# Altium PCB Boost_Test.PcbDoc
Units mil, origin at the board's own origin, x right, y up, seen from the top; angles counter-clockwise.
Board outline 8570 x 4620 mil, 2 copper layers (Top Layer, Bottom Layer); 59 components, 0 nets, 174 pads, 34 vias.
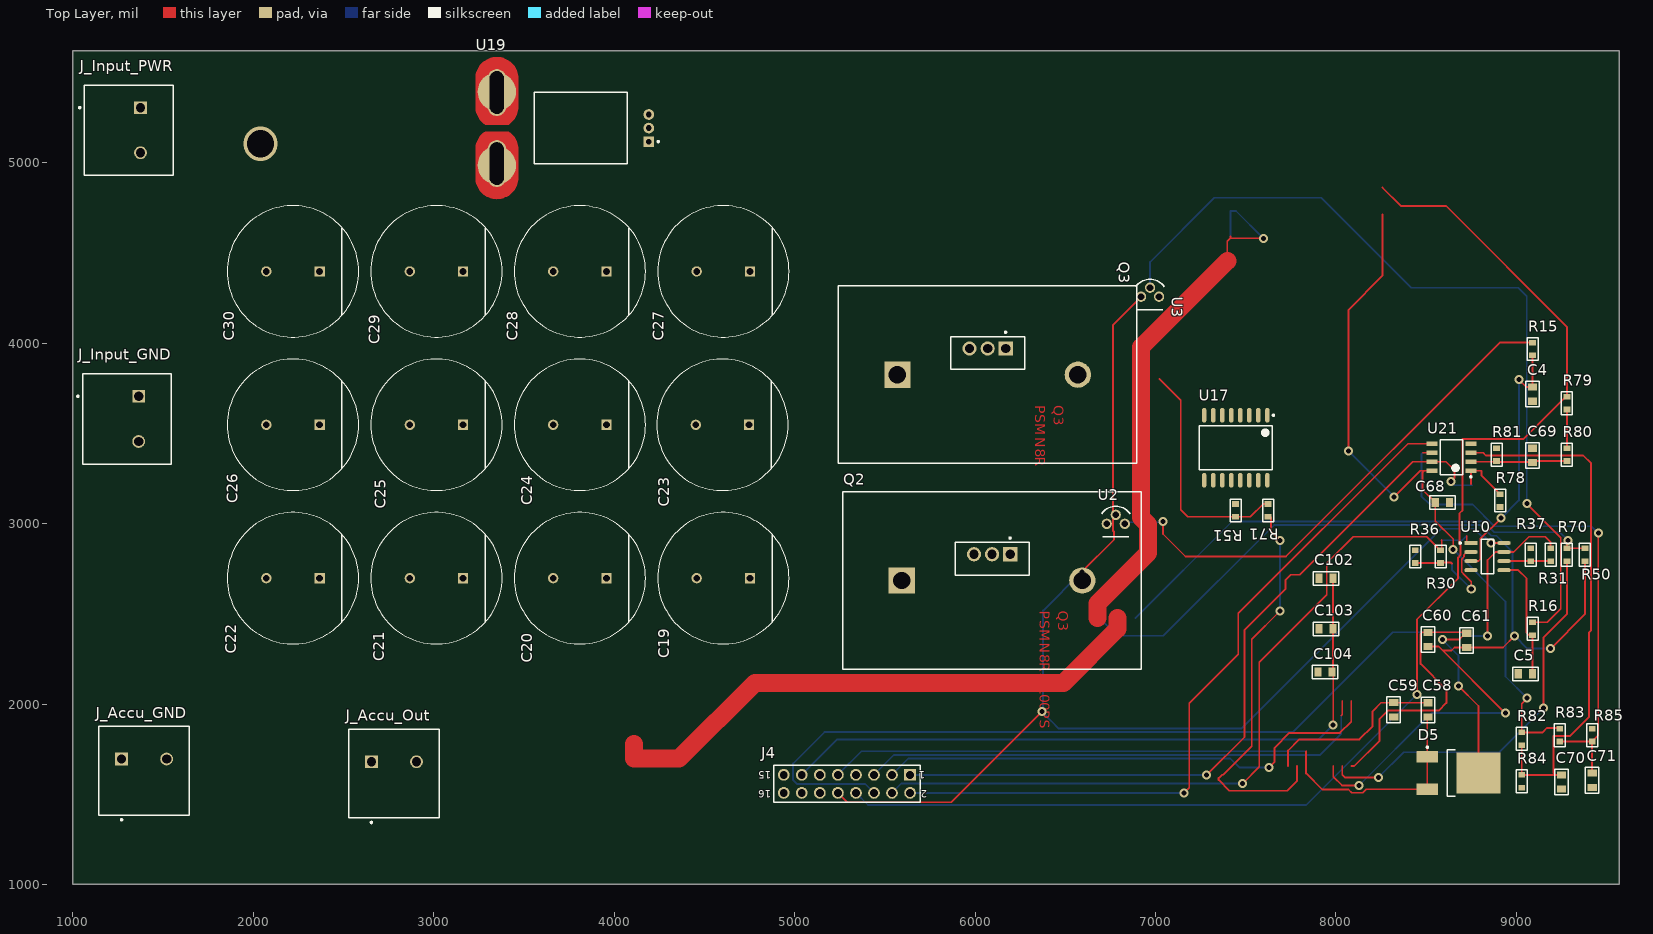
[diagram p0: Top Layer view]
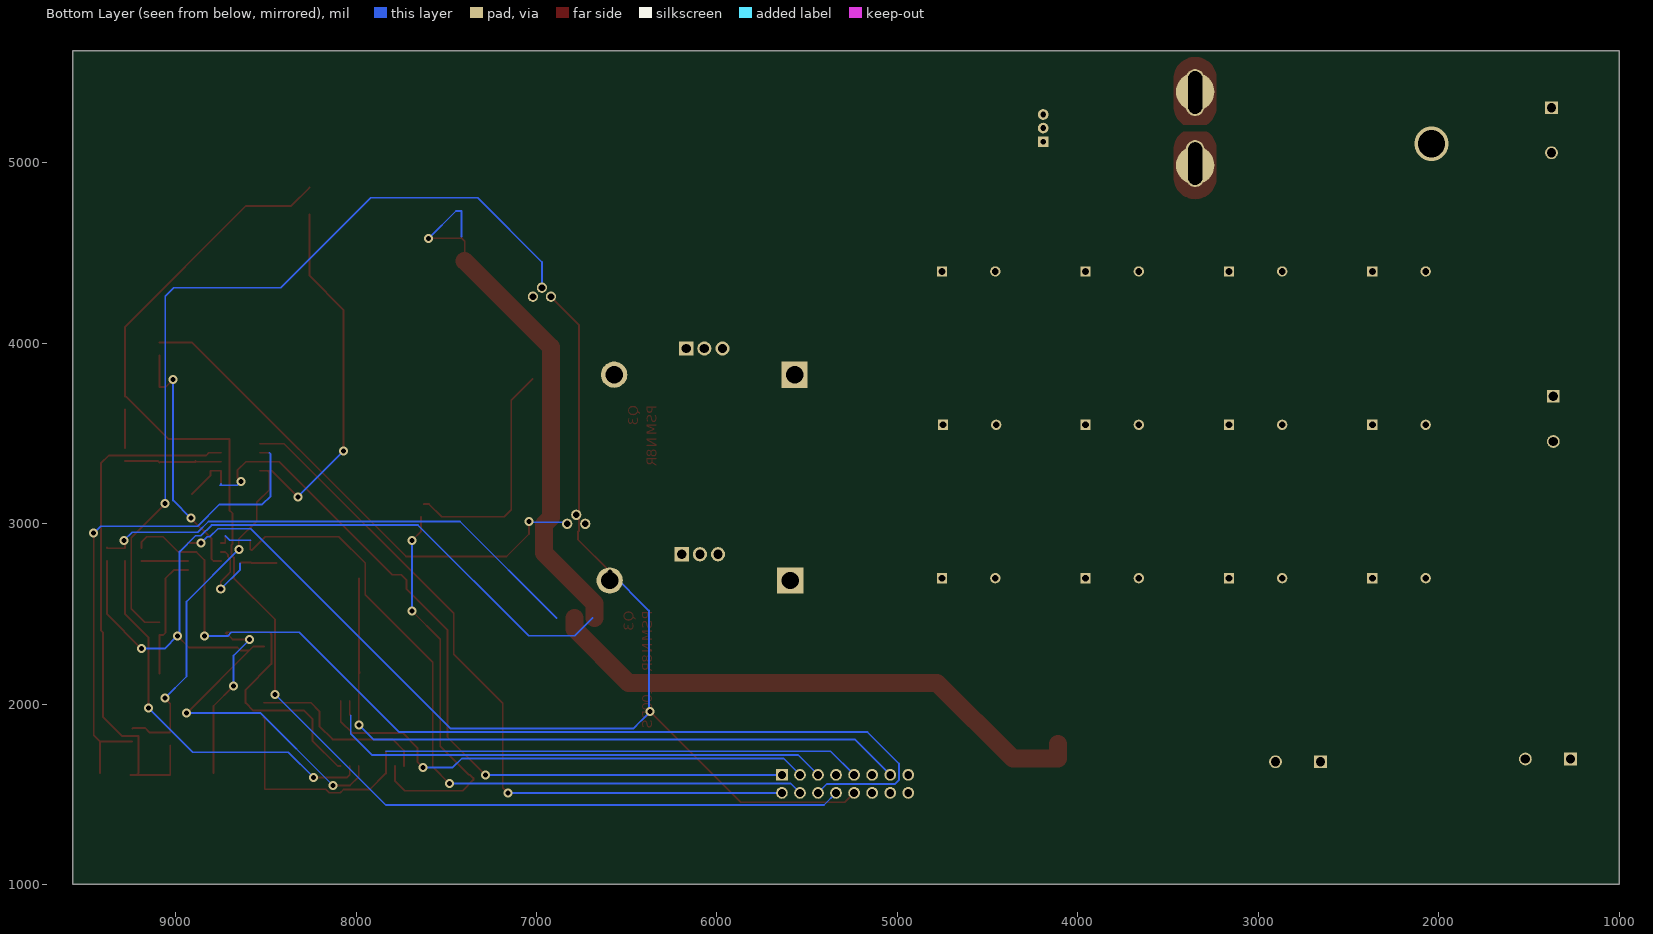
[diagram p1: Bottom Layer view, seen from below]

## Layer stack, top to bottom
Top Solder: solder mask 0.4, Solder Resist, Dk 3.5
Top Layer: signal copper 1.4
Dielectric 1: dielectric 12.6, FR-4, Dk 4.8
Bottom Layer: signal copper 1.4
Bottom Solder: solder mask 0.4, Solder Resist, Dk 3.5

## Board outline
1000,1000 9570,1000 9570,5620 1000,5620

## Design rules (kind name [scope] priority, off if disabled: settings)
Clearance [All] p1: gap=10 ignorepadtopadclearanceinfootprint=FALSE except(0: Arc-Hole Track-Hole SMDPad-Hole THPad-Hole Via-Hole Fill-Hole Poly-Hole Region-Hole Text-Hole)
PolygonConnect [All] p1: connectstyle=Relief reliefconductorwidth=10 reliefentries=4 polygonreliefangle="90 Angle" airgapwidth=10
RoutingVias [All] p1: holewidth=28 width=50 viastyle="Through Hole" minholewidth=28 minwidth=50 maxholewidth=28 maxwidth=50
SolderMaskExpansion [All] p1: expansion=4 istentingtop=FALSE
Width [All] p1: maxlimit=10 minlimit=10 preferedwidth=10
30 further rules are at their usual default settings.

## Components (designator, comment, footprint, x,y, rotation, side; value= is the part's Value field where it differs from the comment)
C4 "22uF" FP_0805_CAP_085 9090.1,3717.35 r90 top
C5 "22uF" FP_0805_CAP_085 9050.1,2167.35 r0 top
C19 "330 uF" FP-LXW18X25-MFG 4605.1,2697.35 r180 top
C20 "330 uF" FP-LXW18X25-MFG 3810.1,2697.35 r180 top
C21 "330 uF" FP-LXW18X25-MFG 3015.1,2697.35 r180 top
C22 "330 uF" FP-LXW18X25-MFG 2220.1,2697.35 r180 top
C23 "330 uF" FP-LXW18X25-MFG 4600.1,3547.35 r180 top
C24 "330 uF" FP-LXW18X25-MFG 3810.1,3547.35 r180 top
C25 "330 uF" FP-LXW18X25-MFG 3015.1,3547.35 r180 top
C26 "330 uF" FP-LXW18X25-MFG 2220.1,3547.35 r180 top
C27 "330 uF" FP-LXW18X25-MFG 4605.1,4397.35 r180 top
C28 "330 uF" FP-LXW18X25-MFG 3810.1,4397.35 r180 top
C29 "330 uF" FP-LXW18X25-MFG 3015.1,4397.35 r180 top
C30 "330 uF" FP-LXW18X25-MFG 2220.1,4397.35 r180 top
C44 "CAP_AC_68uF" Capacitor_AC_68_uF -100028.9,100356.35 r90 top
C58 "100nF" FP_0805_CAP_085 8510.1,1967.35 r270 top
C59 "1uF" FP_0805_CAP_085 8320.1,1967.98 r270 top
C60 "100nF" FP_0805_CAP_085 8510.1,2357.98 r90 top
C61 "1uF" FP_0805_CAP_085 8725.1,2352.54 r90 top
C68 "100nF" FP_0805_CAP_085 8590.1,3117.35 r0 top
C69 "68nF" FP_0805_CAP_085 9090.1,3377.98 r90 top
C70 "100nF" FP_0805_CAP_085 9250.1,1567.35 r270 top
C71 "100nF" FP_0805_CAP_085 9420.1,1577.35 r270 top
C102 "100nF" FP_0805_CAP_085 7945.1,2696.91 r0 top
C103 "100nF" FP_0805_CAP_085 7945.1,2416.91 r0 top
C104 "100nF" FP_0805_CAP_085 7940.1,2177.35 r0 top
D5 "MBRD360T4G" ONSC-DPAK-3-369C-01_V 8679.87,1617.35 r0 top
J4 "61301621121" 61301621121 5290.1,1557.35 r180 top
J_Accu_GND "1714955" Terminal-PHOE-1714955_V 1395,1695 r0 top
J_Accu_Out "1714955" Terminal-PHOE-1714955_V 2780,1680 r0 top
J_Input_GND "1714955" Terminal-PHOE-1714955_V 1365,3580 r270 top
J_Input_PWR "1714955" Terminal-PHOE-1714955_V 1375,5180 r270 top
L2 "Coil" Tekercs_E65_FERRITE 11725,4470 r0 top value="50 uH"
Q2 "PSMN8R5-100PS" FP-TO-220AB-MFG 6094.61,2804.51 r270 top
Q3 "" FP-TO-220AB-MFG 6070,3945 r270 top
R15 "10K" FP_0603_RES 9090.1,3967.35 r270 top
R16 "10K" FP_0603_RES 9090.1,2417.35 r270 top
R30 "10K" FP_0603_RES 8580.1,2817.35 r270 top
R31 "10K" FP_0603_RES 9190.1,2827.35 r270 top
R36 "10K" FP_0603_RES 8440.1,2817.35 r270 top
R37 "10K" FP_0603_RES 9080.1,2827.35 r270 top
R50 "3.3K" FP_0603_RES 9380.1,2827.35 r90 top
R51 "3.3K" FP_0603_RES 7443.98,3072.66 r90 top
R70 "1.8" FP_0603_RES 9280.1,2827.35 r90 top
R71 "1.8" FP_0603_RES 7623.98,3072.66 r90 top
R78 "3K" FP_0603_RES 8910.1,3127.35 r270 top
R79 "220" FP_0603_RES 9280.1,3667.35 r90 top
R80 "10K" FP_0603_RES 9280.1,3381.91 r270 top
R81 "20K" FP_0603_RES 8890.11,3381.91 r90 top
R82 "10K" FP_0603_RES 9030.1,1807.35 r270 top
R83 "22K" FP_0603_RES 9240.1,1827.35 r270 top
R84 "20K" FP_0603_RES 9030.1,1571.91 r270 top
R85 "10K" FP_0603_RES 9420.1,1827.35 r90 top
U2 "MCP9700-E/TO" FP-C04-101-MFG 6780,3010 r270 top
U3 "MCP9700-E/TO" FP-C04-101-MFG 6970.1,4268.6 r270 top
U10 "LM358DR2G" FP-751-07-IPC_C 8840.1,2817.35 r0 top
U17 "2EDS8265HXUMA2" EXAR-WSOIC-16_N 7445,3420 r270 top
U19 "ACS758LCB-050B-PFF-T" FP-CB-5-PFF-MFG 3814.94,5191.85 r90 top
U21 "LM393DR2G" ONSC-SOIC-8-751-07_V 8640.1,3367.35 r180 top

## Footprints (in the part's own frame and the unit in brackets; to place one, negate y for a bottom-side part, rotate by r counter-clockwise, add the part's x,y. Pads: shape width x height; smd on the part's side, far side on the other; paste and mask are expansions set on the pad)
61301621121 [mm] "Pin Header, pitch 2.54 mm, THT, Vertical, dual row, 16p"
  rect 1.65x1.65 hole 1.1: 1(-8.89,-1.27)
  round 1.65 hole 1.1: 2(-8.89,1.27) 3(-6.35,-1.27) 4(-6.35,1.27) 5(-3.81,-1.27) 6(-3.81,1.27) 7(-1.27,-1.27) 8(-1.27,1.27) 9(1.27,-1.27) 10(1.27,1.27) 11(3.81,-1.27) 12(3.81,1.27) 13(6.35,-1.27) 14(6.35,1.27) 15(8.89,-1.27) 16(8.89,1.27)
  silkscreen extent -10.31,-2.61 10.31,2.61, body extent -10.16,-2.54 10.16,2.54, height 8.59
Capacitor_AC_68_uF [mil]
  round 55 hole 35: 1(-120503.27,-120503.27) 2(-119418.27,-120503.27)
  silkscreen extent -120581,-120933 -119341,-120073
EXAR-WSOIC-16_N [mm] "SOIC, 16-Leads, Body 10.30x7.50mm, Pitch 1.27mm, IPC Medium Density"
  oval 2.1x0.6 smd: 1(-4.575,4.445) 2(-4.575,3.175) 3(-4.575,1.905) 4(-4.575,0.635) 5(-4.575,-0.635) 6(-4.575,-1.905) 7(-4.575,-3.175) 8(-4.575,-4.445) 9(4.575,-4.445) 10(4.575,-3.175) 11(4.575,-1.905) 12(4.575,-0.635) 13(4.575,0.635) 14(4.575,1.905) 15(4.575,3.175) 16(4.575,4.445)
  silkscreen extent -4.7,-5.15 3.13,5.42, body extent -3.75,-5.15 3.75,5.15, height 2.65
FP-751-07-IPC_C [mil]
  rect 73.78x21.39 smd paste+0 mask+0: 1(-91.18,75)
  rrect100% 73.78x21.39 smd paste+0 mask+0: 2(-91.18,25) 3(-91.18,-25) 4(-91.18,-75) 5(91.18,-75) 6(91.18,-25) 7(91.18,25) 8(91.18,75)
  silkscreen extent -157,-96 35,96, body extent -132,-100 132,100, height 10
FP-C04-101-MFG [mm]
  round 1.45 hole 0.95 paste-1000 mask+0: 1(0.286,-1.27) 2(-0.984,0) 3(0.286,1.27)
  silkscreen extent -2.17,-2.01 2.13,2.01
FP-CB-5-PFF-MFG [mm]
  rect 1.5x1.5 hole 0.8 paste-1000 mask+0: 1(-1.91,-9.59)
  round 1.5 hole 0.8 paste-1000 mask+0: 2(0,-9.59) 3(1.91,-9.59)
  rrect100% 6.6x2.6 hole 2 slot 6 at 0 deg paste-1000 mask+0: 4(5,11.809) 5(-5,11.809)
  round 5.4 smd paste-1000 mask+0: 4(5.099,11.809) 5(-5.25,11.809)
  round 5.4 smd far side paste-1000 mask+0: 4(5.099,11.809) 5(-5.25,11.809)
  Top Layer region: -0.5,10.151 -1.581,9.166 -3,8.81 -3,8.81 -7,8.809 -8.302,9.107 -9.345,9.939 -9.925,11.142 -9.925,12.477 -9.345,13.68 -8.302,14.512 -7,14.809 -7,14.81 -3,14.81 -1.581,14.453 -0.5,13.468 -0.5,13.468
  Top Layer region: 0.5,13.468 1.581,14.453 3,14.809 3,14.809 7,14.81 8.302,14.512 9.345,13.68 9.925,12.477 9.925,11.142 9.345,9.939 8.302,9.107 7,8.809 7,8.809 3,8.809 1.581,9.166 0.5,10.151 0.5,10.151
  silkscreen extent -5.05,-11.04 5.05,6.55, body extent -10.1,-10.44 10.1,14.91, height 0.25
FP-LXW18X25-MFG [mm]
  rect 1.45x1.45 hole 0.95 paste-1000 mask+0: 1(-3.75,0)
  round 1.45 hole 0.95 paste-1000 mask+0: 2(3.75,0)
  silkscreen extent -9.25,-9.25 9.25,9.25, body extent -9.35,-9.35 9.35,9.35, height 0.25
FP-TO-220AB-MFG [mm]
  rect 2x2 hole 1.3 paste-1000 mask+0: 1(-0.647,2.55)
  rect 3.7x3.7 hole 2.45 paste-1000 mask+0: 1(3.048,-12.7)
  round 2 hole 1.3 paste-1000 mask+0: 2(-0.647,0) 3(-0.647,-2.55)
  round 3.7 hole 2.45 paste-1000 mask+0: 2(3.048,12.7)
  Top Layer region: 12.816,-13.418 12.816,-13.418 12.816,-13.418 12.816,-13.418
  Top Layer region: 12.816,-13.418 12.816,-13.418 12.816,-13.418 12.816,-13.418
  Top Layer region: 12.816,-13.418 12.816,-13.418 12.816,-13.418 12.816,-13.418
  silkscreen extent -9.45,-21 15.55,21, body extent -9.55,-21.1 15.65,21.1, height 0.25
FP_0603_RES [mm] "0603 ellenállás"
  rect 0.8x0.95 smd: 1(-0.9,0) 2(0.9,0)
  silkscreen extent -1.6,-0.78 1.6,0.78, body extent -0.8,-0.4 0.8,0.4, height 0.44
FP_0805_CAP_085 [mm] "0805 kapacitás YAGEO 0.85mm magas"
  rect 1x1.3 smd: 1(-1,0) 2(1,0)
  silkscreen extent -1.8,-0.95 1.8,0.95, body extent -1,-0.64 1.03,0.64, height 0.85
ONSC-DPAK-3-369C-01_V [mm] "DPAK, 3-Leads, Body 6.54x6.095mm, Pitch 2.29mm"
  rect 3x1.6 smd: 1(-4.4,2.29) 3(-4.4,-2.29)
  rect 6.2x5.8 smd: 4(2.8,0)
  silkscreen extent -4.52,-3.27 -0.45,3.76, body extent -1.6,-3.27 4.49,3.27, height 2.38
ONSC-SOIC-8-751-07_V [mm] "SOIC, 8-Leads, Body 4.9x3.9mm, Pitch 1.27mm"
  rect 1.52x0.6 smd: 1(-2.74,1.905) 2(-2.74,0.635) 3(-2.74,-0.635) 4(-2.74,-1.905) 5(2.74,-1.905) 6(2.74,-0.635) 7(2.74,0.635) 8(2.74,1.905)
  silkscreen extent -2.87,-2.45 1.58,2.88, body extent -1.95,-2.45 1.95,2.45, height 1.75
Tekercs_E65_FERRITE [mil]
  round 190 hole 150: 1(-700,0) 2(700,0)
  silkscreen extent -550,-1300 550,1300
Terminal-PHOE-1714955_V [mm] "Terminal Block, 2-Leads, Body 12.7x12.5mm, Pitch 6.35mm"
  rect 1.8x1.8 hole 1.3: 1(-3.175,0)
  round 1.8 hole 1.3: 2(3.175,0)
  silkscreen extent -6.35,-8.67 6.35,4.6, body extent -6.92,-7.9 6.35,4.6, height 21.51

## Part data
C4 C5 C58 C59 C60 C61 C68 C69 C70 C71 C102 C103 C104: library part CAP, "Capacitor"
C19 C20 C21 C22 C23 C24 C25 C26 C27 C28 C29 C30: library part CMP-35376-000008-1, "CAP ALUM 47UF 20% 500V THRUHOLE / 500LXW47MEFR18X25"
C44: "Cap Film 68uF 100V PET 10% (31.5 X 22 X 36.5mm) Radial 27.5mm 125C Bulk", Capacitance=68uF, Case/Package=Radial, Dielectric=PET, Dielectric Material=Polyester, Manufacturer="TDK EPCOS", Manufacturer Part Number=B32524Q1686K000, Max Operating Temperature=125°C, Min Operating Temperature=-55°C, Tolerance=10%, Voltage Rating=100V, Category="Film Capacitors", ComponentLink1Description=http://www.farnell.com/datasheets/1955213.pdf?src-supplier=Farnell, ComponentLink1URL=http://www.farnell.com/datasheets/1955213.pdf?src-supplier=Farnell, ComponentLink2Description=http://components.arrow.com/part/dataview/0323_01924821?src-supplier=Arrow+Europe, ComponentLink2URL=http://components.arrow.com/part/dataview/0323_01924821?src-supplier=Arrow+Europe, ComponentLink3Description=https://www.tdk-electronics.tdk.com/inf/20/20/db/fc_2009/B32520_529.pdf?src-supplier=Digi-Key, ComponentLink3URL=https://www.tdk-electronics.tdk.com/inf/20/20/db/fc_2009/B32520_529.pdf?src-supplier=Digi-Key, ComponentLink4Description=http://www.farnell.com/datasheets/1955213.pdf?src-supplier=Element14, ComponentLink4URL=http://www.farnell.com/datasheets/1955213.pdf?src-supplier=Element14, Depth=22mm, Lead Diameter=0.8mm, Lead Pitch=27.5mm, Length=31.5mm, Packaging=Bulk, Pricing 1="1=16,57000, 10=15,74200, 50=13,25680, 100=12,42830, 500=11,01972, 1000=10,35688 (USD)", REACH SVHC="No SVHC", RoHS=Yes, RoHS Compliant=Yes, Stock 1=15, Supplier 1=Digi-Key, Voltage Rating (DC)=100V
D5: library part CMP-1055-00192-1, "SWITCHMODE(TM) Power Rectifier, 3-Pin DPAK, Pb-Free, Tape and Reel", Manufacturer="On Semiconductor", ComponentLink1Description="Manufacturer URL", ComponentLink1URL=http://www.onsemi.com/, ComponentLink2Description=Datasheet, ComponentLink2URL=http://www.onsemi.com/pub_link/Collateral/MBRD320-D.PDF, ComponentLink3Description="Package Specification", ComponentLink3URL=http://www.onsemi.cn/pub_link/Collateral/369C.PDF, Configuration=Single, DatasheetVersion="Rev. 8", IFSM Max (A)=75, Mounting Technology="Surface Mount", PackageDescription="3-Pin Flange Mount, Body 6.54 x 6.095 mm, Pitch 2.29 mm", PackageReference=DPAK-3-369C-01, PackageVersion="Rev. E, 02/2014", Packing="Tape and Reel", PartNumber=MBRD360T4G, RoHS=TRUE
J4: library part CMP-1502-01097-1, "THT Vertical Pin Header WR-PHD, Pitch 2.54 mm, Dual Row, 16 pins", Contact Resistance=20mOhm, Manufacturer="Wurth Elektronik", Operating Temperature=-40to105degC, Rated Current=3A, Withstanding Voltage=500VAC, Working Voltage=250VAC, Datasheet URL=https://katalog.we-online.de/em/datasheet/6130xx21121.pdf, Gender=Male, Manufacturer URL=http://www.we-online.de, Mounting Technology=THT, Orientation=Vertical, Package Reference=61301621121, Packaging=Bag, Part Number=61301621121, Pin Number=16, Pitch=2.54mm, Publisher=WurthElektronik, Row Number=Dual
J_Accu_GND J_Accu_Out J_Input_GND J_Input_PWR: library part Terminal-CMP-2000-05797-1, "PC Terminal Block, Pitch 6.35 mm, 1 x 2 Position, Height 21.5 mm, Tail Lenght 5.1 mm, RoHS, Bulk", Manufacturer="Phoenix Contact", Package Description="PC Terminal Block, Pitch 6.35 mm, 1 x 2 Position, Height 21.5 mm, Tail Lenght 5.1 mm", Datasheet URL=http://media.digikey.com/pdf/Data%20Sheets/Phoenix%20Contact%20PDFs/1714955.pdf, Datasheet Version=02/2010, Manufacturer URL=http://www.phoenixcontact.com/, Mounting Technology=ThroughHole, Package Reference=1714955
L2: "50 uH", Category=Inductor
Q2 Q3: library part NMOS-2, "N-channel 100 V 8.5 mΩ standard level MOSFET in TO220", ComponentLink1Description="Manufacturer Link", ComponentLink1URL=http://www.irf.com/, DatasheetVersion=PD-9.814, LatestRevisionDate=17-Jul-2002, LatestRevisionNote="Re-released for DXP Platform.", Note="Pin 2 is electrically connected to pin 4.", PackageDescription="TO, Thru-Hole, Vertical, Heatsink Mounted; 3 In-Line Leads; Pitch 2.54 mm", PackageReference=TO-220AB, PackageVersion=Feb-1997, Published=8-Jun-2000, Publisher="Altium Limited"
R15 R16 R30 R31 R36 R37 R50 R51 R70 R71 R78 R79 R80 R81 R82 R83 R84 R85: library part RES, "Resistor"
U2 U3: library part CMP-0192-00001-2, "SENSOR ANALOG -40C-125C TO92-3", Ambient Temperature Range High=+125°C, Ambient Temperature Range Low=-40°C, Manufacturer=Microchip, Max Junction Temp=+150°C, Max Supply Voltage=5.5V, Min Supply Voltage=2.3V, Operating Supply Current=6uA, Output Current=100uA, Output Voltage=500mV, Package=C04-101, Temperature="-40°C to +125°C", Automotive=No, Category=IC, ComponentLink2Description=Datasheet, ComponentLink2URL=http://ww1.microchip.com/downloads/en/DeviceDoc/20001942G.pdf, Device Class L1=Sensors, Device Class L2="Temperature and Humidity Sensors", Device Class L3=unset, Digikey Description="SENSOR ANALOG -40C-125C TO92-3", Footprint Url=http://ww1.microchip.com/downloads/en/DeviceDoc/3L_TO-92%20Plastic%20Transistor%20Outline_TO_C04-00101c.pdf, Height=5.334mm, Import Ts=1521170835, Ipc Land Pattern Name=TO-92, Lead Free=Yes, Manufacturer Part Number=MCP9700-E/TO, Mouser Description="Board Mount Temperature Sensors Lin Active Therm", Octopart=https://octopart.com/mcp9700-e%2Fto-microchip-668812, RoHS=TRUE, Sensor Output="Analog Voltage", Temperature Range High=+125°C, Temperature Range Low=-40°C
U10: library part CMP-1310-00291-2, "IC OPAMP GP 2 CIRCUIT 8SOIC", Case/Package=SOIC, Dual Supply Voltage=9V, Input Bias Current=250nA, Input Offset Voltage (Vos)=7mV, Max Dual Supply Voltage=16V, Max Operating Temperature=70°C, Max Supply Voltage=32V, Min Dual Supply Voltage=1.5V, Min Operating Temperature=0°C, Min Supply Voltage=3V, Nominal Supply Current=1.2mA, Operating Supply Current=1.5mA, Output Current=40mA, Package Quantity=2500, Power Supply Rejection Ratio (PSRR)=65dB, Voltage Gain=100dB, Bandwidth=1MHz, Common Mode Rejection Ratio=65dB, Contact Plating=Tin, Gain Bandwidth Product=1MHz, Halogen Free="Halogen Free", Height=1.5mm, Lead Free="Lead Free", Length=5mm, Number of Amplifiers=2, Number of Channels=2, Number of Circuits=2, Number of Elements=2, Number of Pins=8, Operating Supply Voltage=16V, Output Current per Channel=40mA, Packaging="Tape and Reel", Radiation Hardening=No, REACH SVHC="No SVHC", Slew Rate=0.6V/µs, Width=4mm
U17: library part GATE_DRIVER_2EDS8265HXUMA2, "2EDS8265HXUMA2 / Gate-Driver 8A", Case/Package="SOIC W", Manufacturer=Exar, Max Operating Temperature=70°C, Max Power Dissipation=1.26W, Max Supply Voltage=5.5V, Min Operating Temperature=0°C, Min Supply Voltage=3V, Nominal Supply Current=1mA, Package Quantity=41, Category="RS-232 / RS-422 / RS-485 Interface ICs", ComponentLink1Description=https://datasheet.ciiva.com/22828/0900766b81141d49-22828237.pdf?src-supplier=RSComponents, ComponentLink1URL=https://datasheet.ciiva.com/22828/0900766b81141d49-22828237.pdf?src-supplier=RSComponents, ComponentLink2Description=https://datasheet.ciiva.com/1715/sp3222eb-sp3232eb-103-081414-1715199.pdf?src-supplier=Digi-Key, ComponentLink2URL=https://datasheet.ciiva.com/1715/sp3222eb-sp3232eb-103-081414-1715199.pdf?src-supplier=Digi-Key, ComponentLink3Description=https://datasheet.ciiva.com/16380/sp3232ebca-l-16380121.pdf?src-supplier=Future+Electronics, ComponentLink3URL=https://datasheet.ciiva.com/16380/sp3232ebca-l-16380121.pdf?src-supplier=Future+Electronics, ComponentLink4Description=https://datasheet.ciiva.com/15208/getdatasheetpartid-558353-15208838.pdf?src-supplier=Verical, ComponentLink4URL=https://datasheet.ciiva.com/15208/getdatasheetpartid-558353-15208838.pdf?src-supplier=Verical, Height=2.55mm, Lead Free="Lead Free", Length=10.3mm, Logic Function=Transceiver, Manufacturer Part Number=2EDS8265HXUMA2, Number of Drivers=2, Number of I/Os=4, Number of Pins=16, Number of Receivers=2, Number of Transceivers=1, Number of Transmitters=2, Packaging=Rail/Tube, Propagation Delay=0.15us, Radiation Hardening=No, RoHS=Yes, Series=-, Supplier 1="Allied Electronics", Supply Current=1mA, Width=7.5mm
U19: library part ACS758LCB-CMP-82923-000254-1, "SENSOR CURRENT HALL 50A AC/DC", Current Sensing=50A, Frequency=120kHz, Max Operating Temperature=150°C, Max Supply Current=13.5mA, Max Supply Voltage=5.5V, Min Operating Temperature=-40°C, Min Supply Voltage=3V, Operating Supply Voltage=5V, Output Current=1mA, Package Quantity=34, Quiescent Current=10mA, Accuracy=2%, Bandwidth=120kHz, Height=7mm, Lead Free="Lead Free", Length=10mm, Linearity=1%, Mount="Through Hole", Number of Channels=1, Number of Pins=5, Packaging=Rail/Tube, Polarity=Bidirectional, Radiation Hardening=No, REACH SVHC="No SVHC", Response Time=4us, RoHS Compliant=Yes, Sensitivity=40mV/A, Series=-, Width=13mm
U21: library part CMP-1305-00048-1, "Low Offset Voltage Dual Comparators, 2 to 36 V, 0 to 70 degC, 8-Pin SOIC, Pb-Free, Tape and Reel", Manufacturer="On Semiconductor", ComponentLink1Description="Manufacturer URL", ComponentLink1URL=http://www.onsemi.com/, ComponentLink2Description=Datasheet, ComponentLink2URL=http://www.onsemi.com/pub_link/Collateral/LM393-D.PDF, ComponentLink3Description="Package Specification", ComponentLink3URL=http://www.onsemi.com/pub_link/Collateral/751-07.PDF, DatasheetVersion="Rev. 25", ICC Typ (mA)=0.4, IO Typ (mA)=16, Mounting Technology="Surface Mount", PackageDescription="8-Pin Small Outline Integrated Circuit, Body 4.9 x 3.9 mm, Pitch 1.27 mm", PackageReference=SOIC-8-751-07, PackageVersion="Rev. AK, 02/2011", Packing="Tape and Reel", PartNumber=LM393DR2G, RoHS=TRUE, VCC Max (V)=36, VCC Min (V)=2

## Via types
v1: diameter 50, hole 28, Top Layer to Bottom Layer, 33 vias
v2: diameter 190, hole 150, Top Layer to Bottom Layer, 1 vias

## Nets (pads, with @x,y where several pads share a name; then routed paths per layer and width w, separated by ;. In a path a pad name is that pad's centre, name@x,y a point inside that pad or via, vN(x,y) a via of type N, cw(c..) or ccw(c..) an arc to the next point about the centre after c; other vN are vias at no path point)
pads on no net: C4.1 C4.2 C5.1 C5.2 C19.1 C19.2 C20.1 C20.2 C21.1 C21.2 C22.1 C22.2 C23.1 C23.2 C24.1 C24.2 C25.1 C25.2 C26.1 C26.2 C27.1 C27.2 C28.1 C28.2 C29.1 C29.2 C30.1 C30.2 C44.1 C44.2 C58.1 C58.2 C59.1 C59.2 C60.1 C60.2 C61.1 C61.2 C68.1 C68.2 C69.1 C69.2 C70.1 C70.2 C71.1 C71.2 C102.1 C102.2 C103.1 C103.2 C104.1 C104.2 D5.1 D5.3 D5.4 J4.1 J4.2 J4.3 J4.4 J4.5 J4.6 J4.7 J4.8 J4.9 J4.10 J4.11 J4.12 J4.13 J4.14 J4.15 J4.16 J_Accu_GND.1 J_Accu_GND.2 J_Accu_Out.1 J_Accu_Out.2 J_Input_GND.1 J_Input_GND.2 J_Input_PWR.1 J_Input_PWR.2 L2.1 L2.2 Q2.1 Q2.2 Q2.3 Q3.1 Q3.2 Q3.3 R15.1 R15.2 R16.1 R16.2 R30.1 R30.2 R31.1 R31.2 R36.1 R36.2 R37.1 R37.2 R50.1 R50.2 R51.1 R51.2 R70.1 R70.2 R71.1 R71.2 R78.1 R78.2 R79.1 R79.2 R80.1 R80.2 R81.1 R81.2 R82.1 R82.2 R83.1 R83.2 R84.1 R84.2 R85.1 R85.2 U2.1 U2.2 U2.3 U3.1 U3.2 U3.3 U10.1 U10.2 U10.3 U10.4 U10.5 U10.6 U10.7 U10.8 U17.1 U17.2 U17.3 U17.4 U17.5 U17.6 U17.7 U17.8 U17.9 U17.10 U17.11 U17.12 U17.13 U17.14 U17.15 U17.16 U19.1 U19.2 U19.3 U19.4 U19.5 U21.1 U21.2 U21.3 U21.4 U21.5 U21.6 U21.7 U21.8
copper on no net: | length 91773.9
  Top Layer w10: 5240.1,1507.35 5292.1,1455.35 5868.1,1455.35 v1(6370.1,1957.35) ; v1(6592.1,2732.35) 6770.1,2910.35 6770.1,2957.35 6765.1,2957.35 6765.1,4102.35 6920.1,4257.35 ; 7020.5,3802.84 7140.1,3683.23 7140.1,3077.35 7180.1,3037.35 7525.83,3037.35 7596.14,3107.65 7623.54,3107.65 7623.98,3108.09 ; v1(7041.6,3012.57) 7041.6,2942.17 7166.42,2817.35 7722.67,2817.35 8908.1,4002.78 9090.1,4002.78 ; v1(7158.1,1507.35) 7187.1,1536.35 7187.1,2004.35 7459.1,2276.35 7459.1,2501.98 8399.47,3442.35 8532.23,3442.35 ; v1(7284.1,1607.35) 7494.1,1817.35 7494.1,2411.35 7721.34,2638.58 7721.34,2687.71 7750.1,2716.48 7799.23,2716.48 8425.1,3342.35 8532.23,3342.35 8610.1,3342.35 8658.1,3294.35 8658.1,3252.35 v1(8638.1,3232.35) ; 7398.04,4455.29 7398.04,4563.53 7415.16,4580.66 ; 7415.16,4590.5 7415.16,4580.66 ; v1(7483.1,1559.35) 7575.1,1651.35 7575.1,2231.35 7949.1,2605.35 7949.1,2781.35 8095.1,2927.35 8503.46,2927.35 8578.02,2852.78 8580.1,2852.78 ; v1(7598.1,4580.66) 7415.16,4580.66 ; v1(7628.1,1648.35) 7660.1,1680.35 7660.1,1757.35 7742.62,1839.87 8022.15,1839.87 8085.1,1902.82 8085.1,2017.47 ; 7640.1,3037.35 7640.1,2956.35 v1(7690.1,2906.35) ; v1(7690.1,2515.35) 7534.1,2359.35 7534.1,1766.35 7376.1,1608.35 7369.1,1608.35 7350.1,1589.35 7350.1,1579.35 7410.1,1519.35 7730.1,1519.35 7785.1,1574.35 7785.1,1657.23 ; 7735.1,1657.23 7735.1,1742.35 7796.61,1803.86 8130.1,1803.86 8203.1,1876.86 8203.1,1960.35 8250.1,2007.35 8320.1,2007.35 8320.73,2006.72 8510.1,2006.72 ; 7834.35,1738.1 7835.1,1737.35 7835.1,1657.23 7835.1,1615.35 7924.36,1526.1 8069.91,1526.1 8087.95,1508.06 8148.82,1508.06 8167.95,1527.19 8506.64,1527.19 8506.64,1707.51 8506.64,1923.25 8510.47,1923.57 8514.2,1923.88 8510.1,1927.98 ; 7979.47,2177.35 7979.47,2171.35 7985.1,2171.35 ; 7984.47,2696.91 7984.47,2416.91 7984.47,2177.35 7984.47,2172.35 7985.1,2171.72 7985.1,2171.35 ; 7985.1,1657.23 7985.1,1597.35 8034.1,1548.35 v1(8128.1,1548.35) ; v1(7985.1,1884.35) 7985.1,2017.47 7985.1,2171.35 ; 8030.1,1936.35 8035.1,1941.35 8035.1,2017.47 ; 8035.1,1657.23 8035.1,1607.35 8049.1,1593.35 v1(8236.1,1593.35) ; v1(8070.1,3401.35) 8070.1,4185.35 8257.68,4372.93 8257.68,4712.15 ; 8085.1,1657.23 8085.1,1656.62 8101.37,1656.62 8242.1,1797.35 8242.1,1917.35 8288.1,1963.35 8570.1,1963.35 8612.62,2005.86 8612.62,2079.1 8469.51,2222.21 8469.51,2387.35 8479.51,2397.35 8510.1,2397.35 8719.67,2397.35 8719.67,2391.91 ; 8257.68,4862.54 8359.88,4760.35 8610.1,4760.35 9280.1,4090.35 9280.1,3702.78 9274.54,3702.78 9041.1,3469.35 8702.1,3469.35 8702.1,3073.35 8685.1,3056.35 8685.1,2885.85 8690.1,2880.85 8690.1,2824.35 8677.03,2811.28 8677.03,2697.27 8449.51,2469.76 v1(8449.51,2053.76) ; v1(8323.1,3148.35) 8467.1,3292.35 8490.1,3292.35 ; 8440.11,2781.91 8580.11,2781.91 8582.47,2784.27 8637.03,2784.27 8643.18,2778.12 ; 8481.1,3392.35 8532.23,3392.35 ; 8510.1,2318.61 8569.84,2318.61 v1(8939.1,1949.35) ; 8532.23,3292.35 8490.1,3292.35 ; 8586,2907.35 8586.58,2908.6 8586.58,2856.31 ; v1(8590.1,2357.35) 8684.63,2357.35 8719.2,2391.91 8719.67,2391.91 ; 8593.54,2296.35 8640.61,2296.35 8657.44,2313.17 8725.1,2313.17 8925.93,2313.17 v1(8990.1,2377.35) ; v1(8650.1,2857.35) 8650.1,2914.35 8550.73,3013.72 8550.73,3117.35 8480.1,3187.98 8480.1,3282.35 8490.1,3292.35 ; v1(8678.66,2100.53) 8790.1,1989.08 8790.1,1617.35 ; 8724.82,2931.35 8725.1,2931.35 8725.1,2892.35 8748.92,2892.35 ; 8725.1,2391.91 8719.67,2391.91 ; 8747.98,3218.47 8747.98,3292.35 8805.1,3292.35 8807.24,3290.21 8807.24,3265.65 8910.1,3162.78 ; 8747.98,3342.35 8885.98,3342.35 8890.11,3346.48 8890.11,3341.91 9086.8,3341.91 9090.1,3338.61 9097.98,3346.48 9280.11,3346.48 ; 8747.98,3392.35 8816.1,3392.35 8831.1,3377.35 9370.1,3377.35 9414.1,3333.35 9414.1,2408.35 9403.1,2397.35 9403.1,1928.35 9298.1,1823.35 9206.1,1823.35 9206.1,1617.35 9216.1,1607.35 ; 8748.92,2792.35 8790.1,2792.35 8801.1,2803.35 8801.1,2915.35 v1(8916.1,3030.35) ; 8748.92,2842.35 8725.81,2842.35 8710.1,2826.64 8710.1,2816.07 8697.03,2802.99 8697.03,2731.7 8712.08,2716.65 8750.1,2678.63 v1(8750.1,2637.35) ; v1(8840.1,2376.35) 8840.1,2797.35 8885.1,2842.35 8931.29,2842.35 8985.1,2842.35 9070.1,2927.35 9160.1,2927.35 9190.1,2897.35 9190.1,2862.78 ; v1(8860.1,2892.35) 8931.29,2892.35 ; 8931.29,2742.35 9010.1,2742.35 9056.1,2696.35 9056.1,2395.91 9070.1,2381.91 9090.11,2381.91 9090.11,2210.35 9089.47,2209.71 9089.47,2167.35 ; 8931.29,2792.35 9080.11,2792.35 9089.68,2792.35 9090.11,2791.91 9190.11,2791.91 ; v1(9014.1,3797.35) 9054.73,3756.72 9090.1,3756.72 9090.11,3844.35 9090.11,3931.91 ; 9030.11,1771.91 9030.11,1607.35 9216.1,1607.35 ; v1(9058.1,3110.35) 9246.1,2922.35 9246.1,2526.78 9172.1,2452.78 9090.1,2452.78 ; v1(9060.1,2032.35) 9030.1,2002.35 9030.1,1842.78 9145.54,1842.78 9170.1,1867.35 9233.8,1867.35 9234.67,1868.22 9240.1,1862.78 ; v1(9150.1,1977.35) 9150.1,2368.35 9280.1,2498.35 9280.1,2791.91 ; v1(9190.1,2307.35) 9380.1,2497.35 9380.1,2791.91 ; 9240.11,1791.91 9418.67,1791.91 ; 9250.1,1606.72 9216.73,1606.72 9216.1,1607.35 ; 9280.1,3417.35 9280.1,3631.91 ; v1(9286.1,2907.35) 9286.1,2888.35 9280.1,2882.35 9280.1,2862.78 9375.54,2862.78 9380.1,2867.35 9380.1,2862.78 ; 9420.1,1616.72 9420.1,1791.91 9418.67,1791.91 ; v1(9454.1,2947.35) 9454.1,1827.35 9418.67,1791.91
  Top Layer w100: 4110.1,1777.35 4110.1,1697.35 4360.1,1697.35 4780.1,2117.35 6490.1,2117.35 6789.71,2416.95 6789.71,2477.35 ; 6679.71,2477.35 6679.71,2556.95 6958.65,2835.89 6958.65,2994.02 6920.1,3032.57 6920.1,3802.84 6920.1,3977.35 7398.04,4455.29
  Bottom Layer w10: 5040.1,1607.35 5236.78,1804.02 7904.78,1804.02 v1(7985.1,1884.35) ; 5240.1,1607.35 5370.85,1738.1 7834.35,1738.1 ; 5340.1,1507.35 5407.1,1440.35 7836.1,1440.35 v1(8449.51,2053.76) ; 5440.1,1507.35 5390.1,1557.35 5012.1,1557.35 4992.1,1577.35 4992.1,1670.35 5165.78,1844.02 7760.78,1844.02 8314.1,2397.35 8690.91,2397.35 8711.91,2376.35 v1(8840.1,2376.35) ; 5440.1,1607.35 5550.85,1718.1 7912.85,1718.1 8030.1,1835.35 8030.1,1936.35 ; 5540.1,1507.35 5592.1,1559.35 v1(7483.1,1559.35) ; 5540.1,1607.35 5630.85,1698.1 7414.1,1698.1 7463.85,1648.35 v1(7628.1,1648.35) ; 5640.1,1507.35 v1(7158.1,1507.35) ; 5640.1,1607.35 v1(7284.1,1607.35) ; v1(6592.1,2732.35) 6377.55,2517.79 6377.55,1964.79 v1(6370.1,1957.35) 6420.1,1907.35 6421,1907.35 6464.32,1864.02 7475.92,1864.02 8583.25,2971.35 8765.28,2971.35 8809.94,2926.68 8825.77,2926.68 v1(8860.1,2892.35) ; 6689.32,2477.35 6788.32,2378.35 7044.1,2378.35 7657.1,2991.35 8801.1,2991.35 8860.1,2932.35 8890.1,2932.35 8978.1,2844.35 8978.1,2389.35 v1(8990.1,2377.35) 9060.1,2307.35 v1(9190.1,2307.35) ; 6820.1,3007.35 v1@7041.6,3007.35 ; 6890.1,2477.35 7424.1,3011.35 8818.1,3011.35 8877.1,2952.35 9241.1,2952.35 v1(9286.1,2907.35) ; 6970.1,4307.35 6970.1,4449.49 7326.11,4805.5 7919.03,4805.5 8417.18,4307.35 9010.1,4307.35 9058.1,4259.35 v1(9058.1,3110.35) ; 7415.16,4590.5 7415.16,4732.35 7446.41,4732.35 v1(7598.1,4580.66) ; v1(7690.1,2515.35) v1(7690.1,2906.35) ; v1(8070.1,3401.35) v1(8323.1,3148.35) ; v1(8128.1,1548.35) 8529.1,1949.35 v1(8939.1,1949.35) ; v1(8236.1,1593.35) 8375.1,1732.35 8905.1,1732.35 v1(9150.1,1977.35) ; 8481.1,3392.35 8474.1,3385.35 8474.1,3152.35 8520.1,3106.35 8757.1,3106.35 8877.93,2985.52 9415.93,2985.52 v1(9454.1,2947.35) ; 8586,2907.35 8700.82,2907.35 8724.82,2931.35 ; v1(8590.1,2357.35) 8678.66,2268.8 v1(8678.66,2100.53) ; v1(8638.1,3232.35) 8658.1,3212.35 8754.1,3212.35 8747.98,3218.47 ; 8643.18,2778.12 8643.18,2744.27 v1(8750.1,2637.35) ; v1(8650.1,2857.35) 8940.1,2567.35 8940.1,2152.35 v1(9060.1,2032.35) ; v1(8916.1,3030.35) 9014.1,3128.35 v1(9014.1,3797.35)
  other v2: 2040,5105

## Text inside footprints (layer, text, board x,y; h text height)
J4: Top Overlay "2" at 5735.77,1521.91 h40 r180; Top Overlay "1" at 5723.96,1628.21 h40 r180; Top Overlay "15" at 4871.99,1628.21 h40 r180; Top Overlay "16" at 4871.99,1521.91 h40 r180
Q2: Top Layer "S" at 6339.61,1913.41 h98.44 r270; Top Layer "P" at 6339.61,1964.16 h98.44 r270; Top Layer "0" at 6339.61,2008.56 h98.44 r270; Top Layer "0" at 6339.61,2052.96 h98.44 r270; Top Layer "1" at 6339.61,2097.36 h98.44 r270; Top Layer "-" at 6339.61,2129.07 h98.44 r270; Top Layer "5" at 6339.61,2173.48 h98.44 r270; Top Layer "R" at 6339.61,2230.56 h98.44 r270; Top Layer "8" at 6339.61,2274.96 h98.44 r270; Top Layer "N" at 6339.61,2338.39 h98.44 r270; Top Layer "M" at 6339.61,2414.51 h98.44 r270; Top Layer "S" at 6339.61,2465.25 h98.44 r270; Top Layer "P" at 6339.61,2516 h98.44 r270; Top Layer "3" at 6441.09,2452.57 h98.44 r270; Top Layer "Q" at 6441.09,2516 h98.44 r270
Q3: Top Layer "R" at 6315,3371.05 h98.44 r270; Top Layer "8" at 6315,3415.45 h98.44 r270; Top Layer "N" at 6315,3478.88 h98.44 r270; Top Layer "M" at 6315,3555 h98.44 r270; Top Layer "S" at 6315,3605.74 h98.44 r270; Top Layer "P" at 6315,3656.49 h98.44 r270; Top Layer "3" at 6416.49,3593.06 h98.44 r270; Top Layer "Q" at 6416.49,3656.49 h98.44 r270